# Altium PCB 无线调试增加.PcbDoc (part 2 of 2)
Units mil, origin at the board's own origin, x right, y up, seen from the top; angles counter-clockwise.
Board outline 3239.62 x 1968.5 mil, 2 copper layers (Top Layer, Bottom Layer); 90 components, 69 nets, 339 pads, 117 vias.
Unrouted connection lines stored in the file: 3.
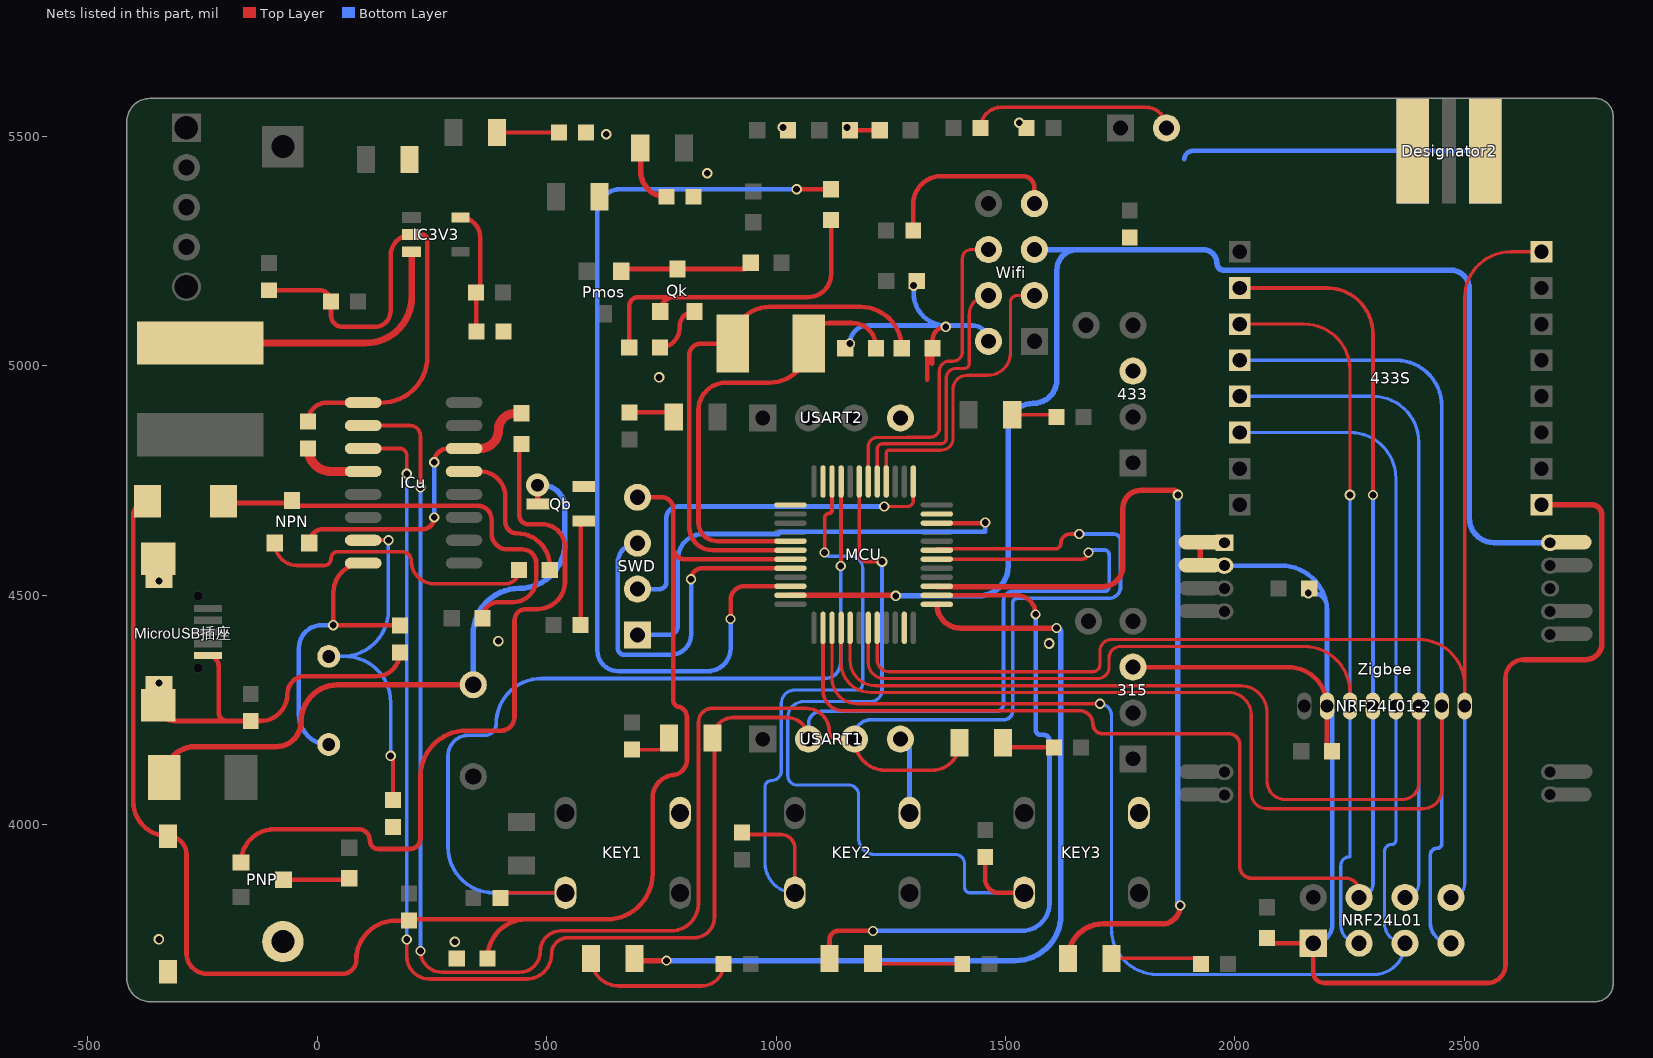
[diagram p2: the nets of this part, all layers, seen from the top]

## Via types
v1: diameter 21, hole 15, Top Layer to Bottom Layer, 52 vias
v2: diameter 22, hole 15, Top Layer to Bottom Layer, 30 vias
v3: diameter 23, hole 15, Top Layer to Bottom Layer, 29 vias
v4: diameter 50, hole 28, Top Layer to Bottom Layer, 2 vias
v5: diameter 153.54, hole 153.54, Top Layer to Bottom Layer, 2 vias
v6: diameter 25, hole 15, Top Layer to Bottom Layer, 1 vias
v7: diameter 30, hole 15, Top Layer to Bottom Layer, 1 vias

## Nets (pads, with @x,y where several pads share a name; then routed paths per layer and width w, separated by ;. In a path a pad name is that pad's centre, name@x,y a point inside that pad or via, vN(x,y) a via of type N, cw(c..) or ccw(c..) an arc to the next point about the centre after c; other vN are vias at no path point) (continued)
GND: 315.3 433.3 433S.16 Battery.2 Cc0.2 Cc1.1 Cc2.1 Cc3.2 Cc4.1 Cc5.1 Cf1.2 Cf2.2 Cin.2 Cn.2 Cout.1 Cp1.1 Cp2.1 Cp3.1 Cs.2 Cw1.2 Cy1.1 Cy2.1 Cz1.2 Designator2.1 Designator2.3 Designator2.4 Designator2.5 IC3V3.2 ICu.1 KEY1.4 KEY2.4 KEY3.4 MCU.8 MCU.23 MCU.35 MCU.47 MicroUSB插座.5 MicroUSB插座.6 NRF24L01-2.2 NRF24L01.1 NRST.2 Qb.2 Qk.2 Rf2.2 Rm.2 Ro1.1 Rp2.2 Rp.1 SWD.3 USART1.4 USART2.4 Wifi.2 Zigbee.23 Zigbee.24 | length 8179.1
  Top Layer w10: MicroUSB插座.6@-346.65,4260.55 ccw(c-312.05,4260.55) -312.05,4225.94 -195.94,4225.94 ; MicroUSB插座.5@-238.39,4368.82 cw(c-238.39,4345.43) -215,4345.43 -215,4245 ccw(c-195.94,4245) -203.91,4227.69 ccw(c-195.94,4245) -195.94,4225.94 ; Cc1.1@-105,5165 5,5165 cw(c5,5140) Cc2.1@30,5140 30,5110 ccw(c55,5110) 55,5085 125,5085 ccw(c125,5120) 160,5120 160,5240.24 cw(c205.95,5240.24) IC3V3.2@205.95,5286.18 228.82,5286.18 cw(c228.82,5275) 240,5275 240,5020 cw(c140,5020) 140,4920 ICu.1@100,4920 20.94,4920 ccw(c20.94,4879.06) Cc3.2@-20,4879.06 ; Cc4.1@180,4375 cw(c128.85,4375) 128.85,4323.85 -26.15,4323.85 ccw(c-26.15,4285) -65,4285 cw(c-124.06,4285) -124.06,4225.94 Cc0.2@-145,4225.94 -195.94,4225.94 ; Rp2.2@746.93,5040 ccw(c746.93,5083.07) 790,5083.07 790,5086.34 cw(c822.4,5086.34) Qk.2@822.4,5118.74 ; v2(815,4535) cw(c839.06,4535) 839.06,4559.06 MCU.8@1031.5,4559.06 ; Cp2.1@1160.95,5513.58 Cp3.1@1225.95,5513.58 ; 1330,4970 1330,5027.64 cw(c1340.95,5027.64) Cy2.1@1340.95,5038.58 ; 1340,5005 1340,5037.64 cw(c1340.95,5037.64) Cy2.1@1340.95,5038.58 ; v3(1370,5085) ccw(c1370,5055.95) 1340.95,5055.95 Cy2.1@1340.95,5038.58 ; 315.3@1777.95,4343.58 1905,4343.58 2115.95,4343.58 cw(c2115.95,4258.58) NRF24L01-2.2@2200.95,4258.58 2200.95,4170.98 ccw(c2211.93,4170.98) Cf1.2@2211.93,4160 ; Cf2.2@2070,3753.07 ccw(c2081.49,3753.07) 2081.49,3741.58 NRF24L01.1@2170.94,3741.58 2170.94,3679.06 ccw(c2195,3679.06) 2195,3655 2550,3655 ccw(c2550,3695) 2551.79,3655.04 ccw(c2550,3695) 2590,3695 2590,4320 cw(c2630,4320) 2630,4360
  Top Layer w12: USART2.4@1270.95,4886.58 USART2.4@1270.95,4893.58 ; Zigbee.23@1924.54,4565.83 Zigbee.24@1924.54,4615.83 ; 2630,4360 2765,4360 ccw(c2765,4395) 2800,4395 2800,4675 ccw(c2777.6,4675) 2777.6,4697.4 433S.16@2668.43,4697.4 433S.16@2654.76,4697.4
  Bottom Layer w10: SWD.3@697.95,4613.58 ccw(c697.95,4570.64) 655,4570.64 655,4385 ccw(c670,4385) 670,4370 770,4370 ccw(c770,4415) 815,4415 v2(815,4535) ; v3(1160.95,5048.58) cw(c1200.47,5048.58) 1200.47,5088.11 v3@1370,5088.11 ; USART1.4@1270.95,4186.58 cw(c1270.95,4166.58) 1290.95,4166.58 KEY2.4@1290.95,4025.58 ; v3(1300,5175) 1300,5158.11 ccw(c1370,5158.11) v3@1370,5088.11 ; Wifi.2@1462.94,5053.58 ccw(c1428.42,5053.58) 1460,5067.53 ccw(c1428.42,5053.58) 1428.42,5088.11 v3@1370,5088.11 ; 1890,5450 cw(c1908.58,5450) 1908.58,5468.58 Designator2.4@2388,5468.58 Designator2.5@2545.48,5468.58 ; Zigbee.23@1977.09,4564.65 2100.95,4564.65 cw(c2100.95,4464.65) 2199.09,4483.81 ; v3(2160,4505) 2170.45,4505 cw(c2170.45,4475.04) 2199.09,4483.81 ; NRF24L01.1@2170.94,3741.58 ccw(c2170.94,3783.11) 2212.47,3783.11 2212.47,4247.06 ccw(c2200.95,4247.06) NRF24L01-2.2@2200.95,4258.58 2200.95,4464.65 ccw(c2100.95,4464.65) 2200.4,4475.04 ccw(c2170.45,4475.04) 2199.09,4483.81
  Bottom Layer w12: Designator2.4@2375.95,5553.58 Designator2.4@2399.91,5472.09
  other v3: 300,3745 -345,3750 1595,4395 395,4400 745,4975 850,5420 630,5505 1015,5520 1155,5520 1530,5530
IO5: MCU.40 Wifi.3 | length 674.3
  Top Layer w7: MCU.40@1240.16,4748.03 1240.16,4810.44 cw(c1245.95,4810.44) 1245.95,4816.23 1359.77,4816.23 ccw(c1359.77,4842.4) 1385.95,4842.4 1385.95,4949.58 cw(c1415.95,4949.58) 1415.95,4979.58 1461.95,4979.58 ccw(c1461.95,5028.58) 1510.95,5028.58 1510.95,5138.58 cw(c1525.94,5138.58) 1525.94,5153.58 Wifi.3@1562.94,5153.58
IO6: MCU.41 Wifi.4 | length 607
  Top Layer w7: MCU.41@1220.47,4748.03 1220.47,4818.76 cw(c1231.95,4818.76) 1231.95,4830.23 1329.95,4830.23 1329.95,4830.5 1359.77,4830.5 ccw(c1359.77,4841.68) 1370.95,4841.68 1370.95,4973.58 cw(c1391.81,4973.58) 1391.81,4994.45 1410.95,4994.45 ccw(c1410.95,5004.45) 1420.95,5004.45 1420.95,5111.58 cw(c1462.94,5111.58) Wifi.4@1462.94,5153.58
IO7: MCU.42 Wifi.6 | length 723.8
  Top Layer w7: MCU.42@1200.79,4748.03 1200.79,4823.58 cw(c1221.43,4823.58) 1221.43,4844.23 1285.95,4844.23 1285.95,4844.5 1335.95,4844.5 ccw(c1335.95,4864.5) 1355.95,4864.5 1355.95,4988.58 cw(c1377.73,4988.58) 1377.73,5010.37 1385.95,5010.37 ccw(c1385.95,5030.37) 1405.95,5030.37 1405.95,5233.8 cw(c1425.73,5233.8) 1425.73,5253.58 Wifi.6@1462.94,5253.58
KEY1: KEY1.1 MCU.45 Rk1.2 | length 2027
  Top Layer w8: Rk1.2@399.05,3840 cw(c410.64,3840) 410.64,3851.58 KEY1.1@540.95,3851.58 ; v2(1140.95,4563.58) ccw(c1140.95,4564.37) 1141.73,4564.37 MCU.45@1141.73,4748.03
  Bottom Layer w8: KEY1.1@540.95,3851.58 385,3851.58 cw(c385,3951.58) 285,3951.58 285,4150 cw(c330,4150) 330,4195 365,4195 ccw(c365,4220) 390,4220 cw(c488.58,4220) 390.32,4227.95 cw(c488.58,4220) 488.58,4318.58 1105.95,4318.58 ccw(c1105.95,4353.58) 1140.95,4353.58 v2(1140.95,4563.58)
KEY2: KEY2.1 MCU.46 Rk2.2 | length 1421.5
  Top Layer w8: Rk2.2@925.94,3982.64 ccw(c930,3982.64) 930,3978.58 1010.95,3978.58 cw(c1010.95,3948.58) 1040.95,3948.58 KEY2.1@1040.95,3851.58 ; v2(1105.95,4593.58) 1105.95,4668.58 cw(c1115.95,4668.58) 1115.95,4678.58 ccw(c1115.95,4684.69) 1122.05,4684.69 MCU.46@1122.05,4748.03
  Bottom Layer w7: KEY2.1@1040.95,3851.58 cw(c1040.95,3916.58) 975.95,3916.58 975.95,4082.35 cw(c989.71,4082.35) 989.71,4096.12 ccw(c989.71,4117.88) 999.76,4098.57 ccw(c989.71,4117.88) 1009.18,4108.15 ccw(c989.71,4117.88) 1011.47,4117.88 1011.47,4264.11 cw(c1040.95,4264.11) 1040.95,4293.58 1175.95,4293.58 ccw(c1175.95,4306.47) 1188.83,4306.47 1188.83,4558.58 ccw(c1162.33,4558.58) 1162.33,4585.08 1114.45,4585.08 cw(c1114.45,4593.58) v2(1105.95,4593.58)
KEY3: KEY3.1 MCU.43 Rk3.2 | length 1738.2
  Top Layer w8: MCU.43@1181.1,4748.03 1181.1,4588.42 ccw(c1195.95,4588.42) 1195.95,4573.58 v3(1230.95,4573.58)
  Top Layer w10: Rk3.2@1455.95,3929.53 1455.95,3881.58 ccw(c1485.95,3881.58) 1485.95,3851.58 KEY3.1@1540.95,3851.58
  Bottom Layer w7: 1230.95,4293.58 cw(c1205.95,4293.58) 1205.95,4268.58 1060.95,4268.58 ccw(c1060.95,4233.11) 1030.95,4252.04 ccw(c1060.95,4233.11) 1025.47,4233.11 1025.47,4107 ccw(c1045.99,4107) 1045.99,4086.48 1158.52,4086.48 cw(c1158.52,4065) 1175.16,4078.58 cw(c1158.52,4065) 1180,4065 1180,3970 ccw(c1215,3970) 1215,3935 1390.95,3935 cw(c1390.95,3915) 1410.95,3915 1410.95,3863.58 ccw(c1422.94,3863.58) 1422.94,3851.58 KEY3.1@1540.95,3851.58
  Bottom Layer w8: 1230.95,4293.58 v3(1230.95,4573.58)
LED1: LED1.2 MCU.25 | length 1909.7
  Top Layer w12: LED1.2@691.94,3708.58 ccw(c696.95,3708.58) 696.95,3703.58 v2(760.95,3703.58) ; MCU.25@1350.39,4480.32 ccw(c1402.13,4480.32) 1402.13,4428.58 v2(1610.95,4428.58)
  Bottom Layer w12: v2(760.95,3703.58) 1520.95,3703.58 ccw(c1520.95,3803.58) 1620.95,3803.58 1620.95,4418.58 ccw(c1610.95,4418.58) v2(1610.95,4428.58)
LED2: LED2.2 MCU.26 | length 1454.5
  Top Layer w10: LED2.2@1116.61,3708.58 1116.61,3749.25 cw(c1135.95,3749.25) 1135.95,3768.58 v2(1210.95,3768.58) ; MCU.26@1350.39,4500 1524.53,4500 cw(c1524.53,4458.58) v2(1565.95,4458.58)
  Bottom Layer w10: v2(1210.95,3768.58) 1535.95,3768.58 ccw(c1535.95,3828.58) 1595.95,3828.58 1595.95,4183.58 ccw(c1583.83,4183.58) 1583.83,4195.69 1577,4195.69 cw(c1577,4206.75) 1565.95,4206.75 v2(1565.95,4458.58)
LED3: LED3.2 MCU.27 | length 1913.5
  Top Layer w12: MCU.27@1350.39,4519.69 ccw(c1356.5,4519.69) 1350.44,4518.91 1711.27,4518.91 ccw(c1711.27,4563.58) 1755.95,4563.58 1755.95,4689.53 cw(c1795,4689.53) 1795,4728.58 1865.95,4728.58 cw(c1865.95,4718.58) v3(1875.95,4718.58) ; LED3.2@1636.65,3708.58 cw(c1711.65,3708.58) 1711.65,3783.58 1840.95,3783.58 ccw(c1840.95,3823.58) v2(1880.95,3823.58)
  Bottom Layer w12: v3(1875.95,4718.58) 1875.95,3828.58 ccw(c1880.95,3828.58) v2(1880.95,3823.58)
NetBUZZER_2: Buzzer.2 Dbuz.A Qb.3 | length 1418.1
  Top Layer w12: Dbuz.A@-333.5,4102.95 cw(c-266.46,4102.95) -266.46,4170 -90,4170 ccw(c-90,4225) -35,4225 cw(c45,4225) 45,4305 Buzzer.2@340,4305 ; v4(480,4740) cw(c480,4739.05) 480.95,4739.05 Qb.3@480.95,4698.94
  Bottom Layer w12: Buzzer.2@340,4305 340,4415 cw(c440,4415) 440,4515 ccw(c440,4615) 540,4615 540,4690 ccw(c490,4690) 490,4740 v4(480,4740)
NetCc3_1: Cc3.1 ICu.4 | length 148.5
  Top Layer w20: Cc3.1@-20,4820 ccw(c30,4820) 30,4770 ICu.4@100,4770
NetCc4_2: Cc4.2 ICu.8 Y2.1 | length 668.6
  Top Layer w10: ICu.8@100,4570 ccw(c100,4505) 35,4505 v3(35,4435) 179.06,4435 cw(c179.06,4434.06) Cc4.2@180,4434.06
  Bottom Layer w10: Y2.1@25.13,4174.76 cw(c25.13,4239.9) -40,4239.9 -40,4385 cw(c10,4385) 10,4435 v3(35,4435)
NetCc5_2: Cc5.2 ICu.7 Y2.2 | length 772.8
  Top Layer w8: ICu.7@100,4620 v2(155,4620) ; v3(160,4150) cw(c160,4145) 165,4145 Cc5.2@165,4054.06
  Bottom Layer w8: Y2.2@25.13,4366.89 55,4366.89 ; v2(155,4620) 155,4466.89 cw(c55,4466.89) 55,4366.89 ; v3(160,4150) 160,4266.89 ccw(c60,4266.89) 60,4366.89 55,4366.89
NetCH340G_13: ICu.13 Rc2.2 | length 336.7
  Top Layer w10: ICu.13@320,4770 355,4770 cw(c355,4715) 410,4715 410,4660 ccw(c435,4660) 435,4635 cw(c435,4563.07) 506.93,4563.07 Rc2.2@506.93,4555
NetCH340G_14: ICu.14 NPN.2 Rc3.2 | length 675.7
  Top Layer w10: NPN.2@-17.6,4613.74 cw(c12.66,4613.74) 12.66,4644 229,4644 ccw(c229,4670) v2(255,4670) ; v2(255,4790) cw(c285,4790) 285,4820 ICu.14@320,4820
  Top Layer w20: ICu.14@320,4820 355,4820 ccw(c355,4860) 395,4860 cw(c431.93,4860) 431.93,4896.93 Rc3.2@445,4896.93
  Bottom Layer w10: v2(255,4670) v2(255,4790)
NetDc1_K: Dc1.K NPN.3 Rc1.1 | length 973.2
  Top Layer w10: Dc1.K@-204.65,4705 ccw(c-200.91,4705) -200.91,4701.26 -55,4701.26 ccw(c-48.74,4701.26) -48.74,4695 350,4695 cw(c350,4665) 380,4665 380,4635 ccw(c415,4635) 415,4600 447.21,4600 cw(c447.21,4570) 477.21,4570 477.21,4540 ; Rc1.1@360,4450 cw(c395,4450) 395,4485 427.18,4485 ccw(c427.18,4534.88) 475.46,4522.32 ccw(c427.18,4534.88) 477.07,4534.88
  Top Layer w20: NPN.3@-58.74,4705 cw(c-58.74,4701.26) NPN.3@-55,4701.26
NetIC3V3_3: IC3V3.3 L.2 | length 616.8
  Top Layer w15: L.2@-255,5050 105.95,5050 ccw(c105.95,5150) 205.95,5150 IC3V3.3@205.95,5248.78
NetIC3V3_5: IC3V3.5 Rf1.2 Rf2.1 | length 278.7
  Top Layer w10: IC3V3.5@312.24,5323.58 cw(c312.24,5280.83) 355,5280.83 355,5169.06 cw(c345.94,5169.06) Rf1.2@345.94,5160 cw(c345.94,5159.06) 346.89,5159.06 Rf2.1@346.89,5075
NetLED1_1: LED1.1 Rled1.1 | length 350.5
  Top Layer w8: LED1.1@597.01,3708.58 ccw(c657.01,3708.58) 657.01,3648.58 837.78,3648.58 ccw(c837.78,3696.65) Rled1.1@885.85,3696.65
NetLED2_1: LED2.1 Rled2.1 | length 201.2
  Top Layer w8: LED2.1@1211.54,3708.58 ccw(c1223.47,3708.58) 1223.47,3696.65 Rled2.1@1405.9,3696.65
NetLED3_1: LED3.1 Rled3.1 | length 201.2
  Top Layer w8: LED3.1@1731.59,3708.58 1914.02,3708.58 cw(c1914.02,3696.65) Rled3.1@1925.95,3696.65
NetLR1_1: LR1.1 RR1.1 | length 116.8
  Top Layer w10: LR1.1@1494.88,4178.58 ccw(c1504.88,4178.58) 1504.88,4168.58 RR1.1@1605.95,4168.58
NetLR2_1: LR2.1 RR2.1 | length 98.9
  Top Layer w8: LR2.1@1514.88,4893.58 1605.95,4893.58 cw(c1605.95,4888.58) RR2.1@1610.95,4888.58
NetLT1_1: LT1.1 RT1.1 | length 95.3
  Top Layer w7: RT1.1@685.95,4163.58 742.01,4163.58 ccw(c742.01,4188.58) LT1.1@767.01,4188.58
NetLT2_1: LT2.1 RT2.1 | length 101.8
  Top Layer w10: RT2.1@680.94,4898.58 767.01,4898.58 cw(c767.01,4888.58) LT2.1@777.01,4888.58
NetMLED_2: MLED.2 Rm.1 | length 138.4
  Top Layer w12: MLED.2@704.95,5475 704.95,5424.58 ccw(c760.95,5424.58) Rm.1@760.95,5368.58
NetNPN_1: NPN.1 Rc2.1 | length 634.4
  Top Layer w8: NPN.1@-92.4,4613.74 ccw(c-43.66,4613.74) -43.66,4565 15,4565 ccw(c15,4580) 30,4580 cw(c45,4580) 45,4595 185,4595 cw(c185,4575) 205,4575 ccw(c255,4575) 255,4525 410,4525 ccw(c410,4555) Rc2.1@440,4555
NetPLED_2: PLED.2 Rp.2 | length 134.9
  Top Layer w8: PLED.2@391.95,5508.58 Rp.2@526.89,5508.58
NetPmos_1: Pmos.1 Qk.3 Rp1.1 | length 293.3
  Top Layer w10: Pmos.1@662.4,5206.26 cw(c667.4,5206.26) 667.4,5211.26 Qk.3@785,5211.26 931.26,5211.26 ccw(c931.26,5225) Rp1.1@945,5225
NetPNP_1: PNP.1 Rc3.1 | length 1625.9
  Top Layer w10: PNP.1@-166.26,3917.4 cw(c-93.66,3917.4) -93.66,3990 90,3990 cw(c90,3965) 115,3965 ccw(c133,3965) 133,3947 202,3947 ccw(c202,3970) 225,3970 225,4105 cw(c325,4105) 325,4205 400,4205 ccw(c400,4235) 430,4235 430,4445 cw(c455,4445) 455,4470 480,4470 ccw(c480,4530) 513.47,4480.2 ccw(c480,4530) 540,4530 540,4605 ccw(c490,4605) 490,4655 460,4655 cw(c460,4675) 440,4675 440,4825 cw(c445,4825) Rc3.1@445,4830
NetPNP_3: PNP.3 R4.2 | length 145.5
  Top Layer w10: PNP.3@-73.74,3880 66.93,3880 ccw(c66.93,3883.07) R4.2@70,3883.07
NetQb_1: Qb.1 Rb.2 | length 230.9
  Top Layer w10: Rb.2@574.05,4435 574.05,4655.05 cw(c580.95,4655.05) Qb.1@580.95,4661.94
NetQk_1: Qk.1 Rp2.1 Rp3.2 | length 737.1
  Top Layer w10: Rp2.1@680,5040 680,5130 cw(c700,5130) 700,5150 778.86,5150 ; Qk.1@747.6,5118.74 cw(c778.86,5118.74) 778.86,5150 ; Rp3.2@1120,5318.07 1120,5200 cw(c1070,5200) 1070,5150 778.86,5150
NetRo2_1: Ro2.1 U0.2 | length 456.4
  Top Layer w8: Ro2.1@1445.95,5518.58 cw(c1490.94,5518.58) 1490.94,5563.58 1805.95,5563.58 cw(c1805.95,5518.58) U0.2@1850.95,5518.58
NetRw_2: Rw.2 Wifi.7 | length 405.6
  Top Layer w10: Rw.2@1299.06,5295 1299.06,5352.64 cw(c1360,5352.64) 1305.74,5380.39 cw(c1360,5352.64) 1360,5413.58 1537.94,5413.58 cw(c1537.94,5388.58) 1562.94,5388.58 Wifi.7@1562.94,5353.58
NRST1: Cn.1 Dc1.A MCU.7 NRST.1 Rn1.2 SWD.4 | length 3578.5
  Top Layer w10: Dc1.A@-370,4705 ccw(c-370,4674.01) -400.99,4674.01 -400.99,4050.99 ccw(c-325,4050.99) NRST.1@-325,3975 cw(c-325,3935) -285,3935 -285,3720 ccw(c-240,3720) -240,3675 55,3675 ccw(c55,3705) 85,3705 cw(c170.94,3705) 170.94,3790.94 Rn1.2@200,3790.94 ; Rn1.2@200,3793.58 455.94,3793.58 ; Cn.1@370.95,3708.58 cw(c455.94,3708.58) 455.94,3793.58 ; SWD.4@697.95,4713.58 750.94,4713.58 cw(c750.94,4688.58) 775.95,4688.58 775.95,4603.58 ; MCU.7@1031.5,4578.74 800.79,4578.74 cw(c800.79,4603.58) 775.95,4603.58 ; 455.94,3793.58 630.95,3793.58 ccw(c630.95,3893.58) 730.95,3893.58 730.95,4058.58 cw(c780.95,4058.58) 771.14,4107.61 cw(c780.95,4058.58) 779.17,4108.55 ccw(c771.14,4142.42) 805.95,4142.42 805.95,4233.58 ccw(c780.95,4233.58) 790.23,4256.79 cw(c790.23,4271.08) 783.56,4258.45 cw(c790.23,4271.08) 775.95,4271.08 775.95,4603.58
NRST2: MCU.11 Wifi.5 Zigbee.1 | length 3011.1
  Top Layer w12: MCU.11@1031.5,4500 v3@1260.95,4500
  Bottom Layer w12: 1280.95,4498.58 v3(1260.95,4498.58) 1440.95,4498.58 ccw(c1440.95,4563.58) 1505.95,4563.58 1505.95,4863.58 cw(c1560.95,4863.58) 1560.95,4918.58 ccw(c1560.95,4969.51) 1611.87,4969.51 1611.87,5208.58 cw(c1656.87,5208.58) 1656.87,5253.58 ; Wifi.5@1562.94,5253.58 1656.87,5253.58 ; Zigbee.1@2687.09,4614.65 2564.88,4614.65 cw(c2564.88,4668.58) 2510.95,4668.58 2510.95,5168.58 ccw(c2470.95,5168.58) 2470.95,5208.58 1975.95,5208.58 cw(c1975.95,5223.58) 1960.95,5223.58 ccw(c1930.95,5223.58) 1930.95,5253.58 1656.87,5253.58
OSC1: Cy1.2 MCU.5 Y1.1 | length 996.7
  Top Layer w10: MCU.5@1031.5,4618.11 871.42,4618.11 cw(c871.42,4658.58) 830.95,4658.58 830.95,4903.58 cw(c890.95,4903.58) 890.95,4963.58 985.95,4963.58 ccw(c985.95,5048.58) Y1.1@1070.95,5048.58 cw(c1115.95,5048.58) 1115.95,5093.58 1165.95,5093.58 cw(c1165.95,5041.65) 1217.87,5041.65 Cy1.2@1217.87,5038.58
OSC2: Cy2.2 MCU.6 Y1.2 | length 1198.6
  Top Layer w10: MCU.6@1031.5,4598.43 1031.5,4598.58 860.95,4598.58 cw(c860.95,4648.58) 810.95,4648.58 810.95,5023.58 cw(c835.94,5023.58) 835.94,5048.58 Y1.2@905.59,5048.58 cw(c985.59,5048.58) 985.59,5128.58 1184.02,5128.58 cw(c1184.02,5038.58) Cy2.2@1274.02,5038.58
PWDKEY: MCU.10 Rp3.1 | length 2090.8
  Top Layer w10: v2(900.95,4448.58) 900.95,4489.69 cw(c930.95,4489.69) 930.95,4519.69 MCU.10@1031.5,4519.69 ; v3(1045,5385) Rp3.1@1120,5385
  Bottom Layer w10: v2(900.95,4448.58) 900.95,4384.58 cw(c850.95,4384.58) 850.95,4334.58 656.02,4334.58 cw(c656.02,4380) 610.6,4380 610.6,5335.6 cw(c660,5335.6) 615.02,5356.02 cw(c660,5335.6) 660,5385 v3(1045,5385)
RX1: ICu.2 LR1.2 MCU.31 USART1.3 | length 4474
  Top Layer w8: ICu.2@100,4870 201.83,4870 cw(c201.83,4846.83) 225,4846.83 v2(225,4735) ; v2(225,3725) ccw(c271.42,3725) 271.42,3678.58 440.95,3678.58 ccw(c440.95,3723.58) 485.95,3723.58 cw(c530.95,3723.58) 530.95,3768.58 770.95,3768.58 ccw(c770.95,3828.58) 830.95,3828.58 830.95,4223.58 cw(c860.95,4223.58) 860.95,4253.58 1065.95,4253.58 cw(c1065.95,4203.58) 1115.95,4203.58 ccw(c1132.94,4203.58) 1132.94,4186.58 USART1.3@1170.95,4186.58 ccw(c1238.95,4186.58) 1238.95,4118.58 1339.94,4118.58 ccw(c1339.94,4178.58) LR1.2@1399.95,4178.58 ; MCU.31@1350.39,4598.43 cw(c1365.55,4598.43) 1350.65,4601.2 1608.57,4601.2 ccw(c1608.57,4613.58) 1620.95,4613.58 cw(c1640.95,4613.58) 1640.95,4633.58 v2(1660.95,4633.58)
  Bottom Layer w8: v2(225,3725) v2(225,4735) ; USART1.3@1170.95,4186.58 1170.95,4193.58 cw(c1205.95,4193.58) 1205.95,4228.58 1495.95,4228.58 ccw(c1495.95,4248.58) 1515.95,4248.58 1515.95,4483.58 cw(c1525.95,4483.58) 1525.95,4493.58 1725.95,4493.58 ccw(c1725.95,4518.58) 1750.95,4518.58 1750.95,4618.58 ccw(c1735.95,4618.58) 1735.95,4633.58 v2(1660.95,4633.58)
RXD: 
SPI1_CE: 433S.3 MCU.19 NRF24L01-2.3 NRF24L01.3 | length 2862.1
  Top Layer w7: MCU.19@1200.79,4429.13 1200.79,4353.74 ccw(c1235.95,4353.74) 1235.95,4318.58 1700.95,4318.58 ccw(c1700.95,4343.58) 1725.95,4343.58 1725.95,4363.58 cw(c1750.95,4363.58) 1750.95,4388.58 2150.95,4388.58 cw(c2150.95,4288.58) 2250.95,4288.58 NRF24L01-2.3@2250.95,4258.58 ; 433S.3@2010.95,5091.1 2150.95,5091.1 cw(c2150.95,4991.1) 2250.95,4991.1 v3(2250.95,4718.58)
  Bottom Layer w7: v3(2250.95,4718.58) NRF24L01-2.3@2250.95,4258.58 2250.95,3930.95 cw(c2250,3930.95) 2250,3930 ccw(c2250,3910.92) 2230.92,3910.92 2230.92,3781.61 ccw(c2270.94,3781.61) NRF24L01.3@2270.94,3741.58
SPI1_CSN: 433S.2 MCU.14 NRF24L01-2.4 NRF24L01.4 | length 3262.1
  Top Layer w8: MCU.14@1102.36,4429.13 1102.36,4292.17 ccw(c1145.95,4292.17) 1125.67,4253.58 ccw(c1145.95,4292.17) 1125.95,4253.44 ccw(c1145.95,4292.17) 1145.95,4248.58 1660.95,4248.58 cw(c1660.95,4218.58) 1690.95,4218.58 ccw(c1710.95,4218.58) 1710.95,4198.58 1985.95,4198.58 cw(c1985.95,4173.58) 2010.95,4173.58 2010.95,3908.58 ccw(c2035.95,3908.58) 2035.95,3883.58 2240.94,3883.58 cw(c2240.94,3853.58) NRF24L01.4@2270.94,3853.58 ; 433S.2@2010.95,5169.84 2200.95,5169.84 cw(c2200.95,5069.84) 2300.95,5069.84 v2(2300.95,4718.58)
  Bottom Layer w8: NRF24L01.4@2270.94,3841.58 ccw(c2270.94,3871.59) 2300.95,3871.59 NRF24L01-2.4@2300.95,4258.58 v2(2300.95,4718.58)
SPI1_IRQ: 433S.9 MCU.20 NRF24L01-2.8 NRF24L01.8 | length 3023.7
  Top Layer w7: MCU.20@1220.47,4429.13 1220.47,4359.05 ccw(c1245.95,4359.05) 1245.95,4333.58 1690.95,4333.58 ccw(c1690.95,4348.58) 1705.95,4348.58 1705.95,4378.56 cw(c1730.95,4378.56) 1730.95,4403.56 2400.95,4403.56 cw(c2400.95,4303.56) 2500.95,4303.56 ; NRF24L01-2.8@2500.95,4258.58 2500.95,4303.56 ; 433S.9@2668.43,5248.58 2600.95,5248.58 ccw(c2600.95,5148.58) 2500.95,5148.58 2500.95,4303.56
  Bottom Layer w7: NRF24L01.8@2470.94,3841.58 ccw(c2470.94,3871.59) 2500.95,3871.59 NRF24L01-2.8@2500.95,4258.58
SPI1_MISO: 433S.4 MCU.16 NRF24L01-2.7 NRF24L01.7 | length 3553.5
  Top Layer w7: MCU.16@1141.73,4429.13 1141.73,4352.67 ccw(c1205.95,4352.67) 1205.95,4288.46 1985.95,4288.46 cw(c1985.95,4238.46) 2035.95,4238.46 2035.95,4069.05 ccw(c2070,4069.05) 2070,4035 2410,4035 ccw(c2410,4075.95) 2450.95,4075.95 NRF24L01-2.7@2450.95,4258.58
  Bottom Layer w8: 433S.4@2010.95,5012.36 2350.95,5012.36 cw(c2350.95,4912.36) 2450.95,4912.36 NRF24L01-2.7@2450.95,4258.58 2450.95,3958.58 cw(c2440.95,3958.58) 2440.95,3948.58 ccw(c2440.95,3933.58) 2425.95,3933.58 2425.95,3786.58 ccw(c2470.94,3786.58) NRF24L01.7@2470.94,3741.58
SPI1_MOSI: 433S.5 MCU.17 NRF24L01-2.6 NRF24L01.6 | length 3192.3
  Top Layer w7: MCU.17@1161.42,4429.13 1161.42,4358.11 ccw(c1216.47,4358.11) 1216.47,4303.06 2011.94,4303.06 cw(c2011.94,4245) 2070,4245 2070,4095 ccw(c2110,4095) 2110,4055 2365,4055 ccw(c2365,4090.95) 2400.95,4090.95 NRF24L01-2.6@2400.95,4258.58
  Bottom Layer w7: 433S.5@2010.95,4933.62 2300.95,4933.62 cw(c2300.95,4833.62) 2400.95,4833.62 NRF24L01-2.6@2400.95,4258.58 2400.95,3871.59 cw(c2370.94,3871.59) NRF24L01.6@2370.94,3841.58
SPI1_SCK: 433S.6 MCU.15 NRF24L01-2.5 NRF24L01.5 | length 3416.3
  Top Layer w7: MCU.15@1122.05,4429.13 1122.05,4318.58 ccw(c1177.05,4318.58) 1177.05,4263.58 v2(1705.95,4263.58)
  Bottom Layer w7: v2(1705.95,4263.58) cw(c1705.95,4238.58) 1730.95,4238.58 1730.95,3773.58 ccw(c1830.95,3773.58) 1830.95,3673.58 2302.94,3673.58 ccw(c2302.94,3741.58) NRF24L01.5@2370.94,3741.58 cw(c2370.94,3786.58) 2325.95,3786.58 2325.95,3940.85 cw(c2342.04,3940.85) 2332.25,3953.63 cw(c2342.04,3940.85) 2342.04,3956.94 ccw(c2342.04,3965.85) 2350.95,3965.85 NRF24L01-2.5@2350.95,4258.58 2350.95,4754.88 ccw(c2250.95,4754.88) 2250.95,4854.88 433S.6@2010.95,4854.88
SWCLK: MCU.37 SWD.2 | length 812.9
  Top Layer w7: v2(1235.95,4693.58) 1285.95,4693.58 ccw(c1285.95,4706.85) 1299.21,4706.85 MCU.37@1299.21,4748.03
  Bottom Layer w10: SWD.2@697.95,4513.58 745.95,4513.58 ccw(c745.95,4528.58) 760.95,4528.58 760.95,4668.58 cw(c785.95,4668.58) 785.95,4693.58 v2(1235.95,4693.58)
SWDIO: MCU.34 SWD.1 | length 1074.8
  Top Layer w10: MCU.34@1350.39,4657.48 1454.84,4657.48 ccw(c1454.84,4658.58) v2(1455.95,4658.58)
  Bottom Layer w10: SWD.1@697.95,4413.58 765.95,4413.58 ccw(c765.95,4433.58) 785.95,4433.58 785.95,4578.58 cw(c840.95,4578.58) 840.95,4633.58 1005.95,4633.58 cw(c1010.95,4633.58) 1010.95,4638.58 1455.95,4638.58 v2(1455.95,4658.58)
TX1: ICu.3 LT1.2 MCU.30 USART1.2 | length 4043.8
  Top Layer w8: ICu.3@100,4820 180,4820 cw(c180,4805) 195,4805 v2(195,4765) ; v2(195,3750) 195,3713.58 ccw(c245,3713.58) 245,3663.58 455.95,3663.58 ccw(c455.95,3718.58) 510.95,3718.58 cw(c545.95,3718.58) 545.95,3753.58 820.95,3753.58 ccw(c820.95,3798.58) 865.95,3798.58 865.95,4184.58 ccw(c861.95,4184.58) LT1.2@861.95,4188.58 cw(c906.94,4188.58) 906.94,4233.58 1023.95,4233.58 cw(c1023.95,4186.58) USART1.2@1070.95,4186.58 ; MCU.30@1350.39,4578.74 1350.39,4578.58 1665.95,4578.58 ccw(c1665.95,4593.58) v2(1680.95,4593.58)
  Bottom Layer w8: v2(195,3750) v2(195,4765) ; USART1.2@1070.95,4186.58 1070.95,4220.45 cw(c1097.45,4220.45) 1097.45,4246.95 1479.31,4246.95 ccw(c1479.31,4263.58) 1495.95,4263.58 1495.95,4488.58 cw(c1515.95,4488.58) 1515.95,4508.58 1715.95,4508.58 ccw(c1715.95,4518.58) 1725.95,4518.58 1725.95,4588.58 ccw(c1715.95,4588.58) 1715.95,4598.58 1685.95,4598.58 ccw(c1685.95,4593.58) v2(1680.95,4593.58)
VBAT: MCU.1
pads on no net: 433S.1 433S.7 433S.10 433S.11 433S.12 433S.13 433S.15 Designator2.11 Designator2.22 Designator2.33 Designator2.44 Designator2.55 ICu.9 ICu.10 ICu.11 ICu.12 ICu.15 KEY1.2 KEY1.3 KEY2.2 KEY2.3 KEY3.2 KEY3.3 MCU.2 MCU.3 MCU.4 MCU.18 MCU.32 MCU.33 MCU.38 MicroUSB插座. MicroUSB插座.4 Pkey.1 Pkey.4 Pkey.5 Zigbee.2 Zigbee.3 Zigbee.11 Zigbee.12 Zigbee.13 Zigbee.14
copper on no net: | length 4707.3
  Top Layer w10: -520.99,3670.92 -500.99,3610.92 ; -520.99,5540.92 -500.99,5600.92 ; -510.99,3610.92 -490.99,3610.92 ; -510.99,5600.92 -490.99,5600.92 ; -500.99,4330 -500.99,3610.92 ; -500.99,4881.83 -500.99,5600.92 ; -480.99,3670.92 -500.99,3610.92 ; -480.99,5540.92 -500.99,5600.92 ; -425,5645 -425,5665 ; -365,5635 -425,5655 ; -365,5675 -425,5655 ; 916.59,5655 -425,5655 ; 1478.41,5655 2820,5655 ; 2760,5635 2820,5655 ; 2760,5675 2820,5655 ; 2820,5645 2820,5665
  other v1: 2755.95,4803.58 2790.95,4803.58 2705.95,4808.58 2735.95,4823.58 2810.95,4828.58 2770.95,4833.58 2795.95,4853.58 2810.95,4883.58 2720.95,4918.58 2735.95,4943.58 2720.95,4963.58 2745.95,4973.58 2710.95,4988.58 2735.95,4998.58 2715.95,5018.58 2745.95,5028.58 2710.95,5043.58 2745.95,5058.58 2715.95,5073.58 2745.95,5093.58 2715.95,5108.58 2740.95,5128.58 2715.95,5148.58 2740.95,5163.58 2715.95,5183.58 2740.95,5198.58 2720.95,5223.58 2740.95,5238.58 2710.95,5253.58 2490.95,5273.58 2525.95,5273.58 2565.95,5273.58 2605.95,5273.58 2405,5275 2460,5275 2350,5280 2805.95,5288.58 2375,5295 2440,5295 2405,5300 2340,5310 2810.95,5318.58 2780.95,5323.58 2375,5330 2420,5330 2745.95,5348.58 2710.95,5353.58 2785.95,5353.58 2630.95,5358.58 2670.95,5358.58 2760.95,5378.58 2620.95,5393.58
  other v5: 2700.95,3758.58 2700.95,5458.58

## Polygon pours and split planes (outlines as drawn)
GND on Top Layer "Top Layer-No Net" (solid, pour order 2): -250,5582.96 2700.78,5582.96 2724.62,5582.96 cw(c2724.62,5482.96) 2824.62,5482.96 2824.62,5335 2824.62,3715 cw(c2724.62,3715) 2724.62,3615 2560,3615 -315,3615 cw(c-315,3715) -415,3715 -415,3880 -415,5482.96 cw(c-315,5482.96) -315,5582.96 -250,5582.96
GND on Bottom Layer "Top Layer-No Net" (solid, pour order 4): -175,5582.96 2675,5582.96 2724.62,5582.96 cw(c2724.62,5482.96) 2824.62,5482.96 2824.62,5290 2824.62,3714.46 cw(c2724.62,3714.46) 2724.62,3614.46 2600,3614.46 -315,3614.46 cw(c-315,3714.46) -415,3714.46 -415,3835 -415,5482.96 cw(c-315,5482.96) -315,5582.96 -175,5582.96

## Keep-outs
Keep-Out Layer:
  lines w4.02: -233.76,5582.96 -59.05,5582.96 ; -223.13,3614.46 -9.05,3614.46 ; -88.76,3614.46 2688.14,3614.46 ccw(c2688.14,3750.94) 2824.62,3750.94 2824.62,5459.11 ccw(c2700.78,5459.11) 2700.78,5582.96 -88.76,5582.96 ; 45,5582.96 -282.57,5582.96 ccw(c-282.57,5450.53) -415,5450.53 -415,3751.95 ccw(c-277.51,3751.95) -277.51,3614.46 315,3614.46

## Other copper
Top Layer:
  pour cut-out: 865.95,5443.58 1420.95,5443.58 1420.95,5018.58 865.95,5018.58
  pour cut-out: 2825.95,5583.58 2824.62,4718.58 2824.62,3903.58 1905.95,3903.58 1905.95,5583.58
  text "3245 (mil)" at 926.59,5619.01 h60
  text "1990 (mil)" at -465,4340 h60 r90
Bottom Layer:
  pour cut-out: 1905.95,3903.58 2820.95,3903.58 2820.95,5583.58 1905.95,5583.58
  pour cut-out: 1420.95,5443.58 1420.95,5018.58 865.95,5018.58 865.95,5443.58

## Silkscreen, mask and mechanical layers (free items; w line width, h text height)
Top Overlay:
  drawing of 1137 lines, arcs and shapes, not listed
  text "433A" at 1840.95,5168.58 h60 r270
  text "PA8" at 1680.95,5053.58 h60 r270
  text "G" at 1840.95,5018.58 h60 r270
  text "433M" at 1845.95,4958.58 h60 r270
  text "PB15" at 1885.95,4948.58 h60 r270
  text "RX2" at 1150.95,4943.58 h60
  text "G" at 1265.95,4943.58 h60
  text "3.3" at 935.95,4938.58 h60
  text "TX2" at 1040.95,4938.58 h60
  text "5V" at 1845.95,4798.58 h60 r270
  text "RST" at 795.95,4673.58 h60 r90
  text "G" at 795.95,4598.58 h60 r90
  text "315A" at 1835.95,4533.58 h60 r270
  text "CLK" at 795.95,4468.58 h60 r90
  text "PB11" at 1665.95,4398.58 h60 r270
  text "G" at 1840.95,4378.58 h60 r270
  text "IO" at 795.95,4373.58 h60 r90
  text "315M" at 1835.95,4308.58 h60 r270
  text "PB10" at 1885.95,4293.58 h60 r270
  text "3.3" at 930.95,4243.58 h60
  text "TX1" at 1025.95,4243.58 h60
  text "RX1" at 1135.95,4243.58 h60
  text "G" at 1250.95,4243.58 h60
  text "PB3" at 530,4145 h60
  text "5V" at 1840.95,4143.58 h60 r270
  text "CM1" at 1994.95,4110.58 h60 r270
  text "PB8" at 600.95,4063.58 h60
  text "PB9" at 1120.95,4063.58 h60
  text "PB7" at 1610.95,4063.58 h60
  text "（P）" at 1705,3760 h60
  text "（P）" at 1210.95,3758.58 h60
  text "PB13" at 1110.95,3623.58 h60
  text "PB14" at 1630.95,3623.58 h60
  text "PB12" at 595.95,3618.58 h60
Bottom Overlay:
  drawing of 1832 lines, arcs and shapes, not listed
  text "SPI引脚表：SPI1" at 2535.95,5083.58 h60
  text "CSN:PA4" at 2530.95,4993.58 h60
  text "月由星生   智为享起" at 1419.95,4957.58 h120
  text "SCK:PA5" at 2530.95,4923.58 h60
  text "MISO:PA6" at 2535.95,4858.58 h60
  text "MOSI:PA7" at 2535.95,4793.58 h60
  text "CE:PB1" at 2535.95,4728.58 h60
  text "IRQ:PB2" at 2535.95,4673.58 h60
  text "PowerKey:PA0" at 2545.95,4523.58 h60
  text "NERST2:PA1" at 2550.95,4438.58 h60
  text "http://www.peacemoon.cn" at 1500.94,4280 h100

## Text inside footprints (layer, text, board x,y; h text height)
433S: Top Overlay "GND" at 2500.95,4688.58 h60; Top Overlay "GND" at 2500.95,4758.58 h60; Top Overlay "ANA" at 2500.95,4838.58 h60; Top Overlay "GND" at 2500.95,4918.58 h60; Top Overlay "DATA" at 2470.95,4998.58 h60; Top Overlay "NSS_DA" at 2060.95,5068.58 h60; Top Overlay "NSS_CON" at 2060.95,5148.58 h60; Top Overlay "CLK_OUT" at 2060.95,4758.58 h60; Top Overlay "SCK" at 2060.95,4838.58 h60; Top Overlay "MISO" at 2060.95,4988.58 h60; Top Overlay "MOSI" at 2060.95,4908.58 h60; Top Overlay "POR" at 2060.95,5228.58 h60; Top Overlay "VCC" at 2060.95,4688.58 h60; Top Overlay "IRQ0" at 2490.95,5228.58 h60; Top Overlay "IRQ1" at 2490.95,5158.58 h60; Top Overlay "PLL_LOCK" at 2340.95,5068.58 h60
Battery: Top Overlay "--" at -95,3655 h60 r180; Top Overlay "+" at -55,5560 h60 r90; Bottom Overlay "+" at -55,5560 h60 r90; Bottom Overlay "--" at -95,3655 h60 r180
Buzzer: Top Overlay "+" at 420,4095 h59.06 r90
MicroUSB插座: Top Overlay "-" at -235,4330 h60 r270; Top Overlay "+" at -234.45,4524.33 h39.37 r270
NRF24L01: Top Overlay "3.3V" at 2130.95,3913.58 h45; Top Overlay "CSN" at 2230.95,3913.58 h45; Top Overlay "MOSI" at 2330.95,3913.58 h50; Top Overlay "IRQ" at 2460.95,3913.58 h50; Top Overlay "GND" at 2130.95,3643.58 h45; Top Overlay "CE" at 2250.95,3643.58 h45; Top Overlay "SCK" at 2330.95,3643.58 h45; Top Overlay "MISO" at 2430.95,3643.58 h45
NRF24L01-2: Top Overlay "3.3V" at 2170.95,4308.58 h62.99 r90; Top Overlay "GND" at 2220.95,4308.58 h62.99 r90; Top Overlay "CE" at 2270.95,4308.58 h62.99 r90; Top Overlay "CSN" at 2320.95,4308.58 h62.99 r90; Top Overlay "SCK" at 2370.95,4308.58 h62.99 r90; Top Overlay "MOSI" at 2420.95,4308.58 h62.99 r90; Top Overlay "MISO" at 2470.95,4308.58 h62.99 r90; Top Overlay "IRQ" at 2520.95,4308.58 h62.99 r90
Wifi: Top Overlay "PB5" at 1390.95,5123.58 h45 r90; Top Overlay "PB6" at 1390.95,5213.58 h50 r90; Top Overlay "URXD" at 1390.95,5303.58 h50 r90; Top Overlay "VCC" at 1660.95,5313.58 h45 r90; Top Overlay "RST2" at 1660.95,5203.58 h45 r90; Top Overlay "PB4" at 1656.44,5117.79 h45 r90; Top Overlay "UTXD" at 1650.95,5003.58 h45 r90; Top Overlay "GND" at 1390.95,5013.58 h45 r90
Zigbee: Top Overlay "TX" at 2610.95,4408.58 h40; Top Overlay "RX" at 2610.95,4458.58 h40; Top Overlay "3.3V" at 2002.05,4454.02 h40; Top Overlay "3.3V" at 2002.05,4504.02 h40; Top Overlay "GND" at 2002.05,4605.2 h40; Top Overlay "GND" at 2002.05,4554.02 h40; Top Overlay "RST_N" at 2553.23,4605.2 h40; Top Overlay "P0_0" at 2553.23,4557.95 h40